# Altium PCB MDBU020.PcbDoc (part 1 of 2)
Units mil, origin at the board's own origin, x right, y up, seen from the top; angles counter-clockwise.
Board outline 2200 x 2400 mil, 4 copper layers (Top Layer, Signal Layer 1, Signal Layer 2, Bottom Layer), stack 62.8 mil thick; 105 components, 60 nets, 366 pads, 286 vias.
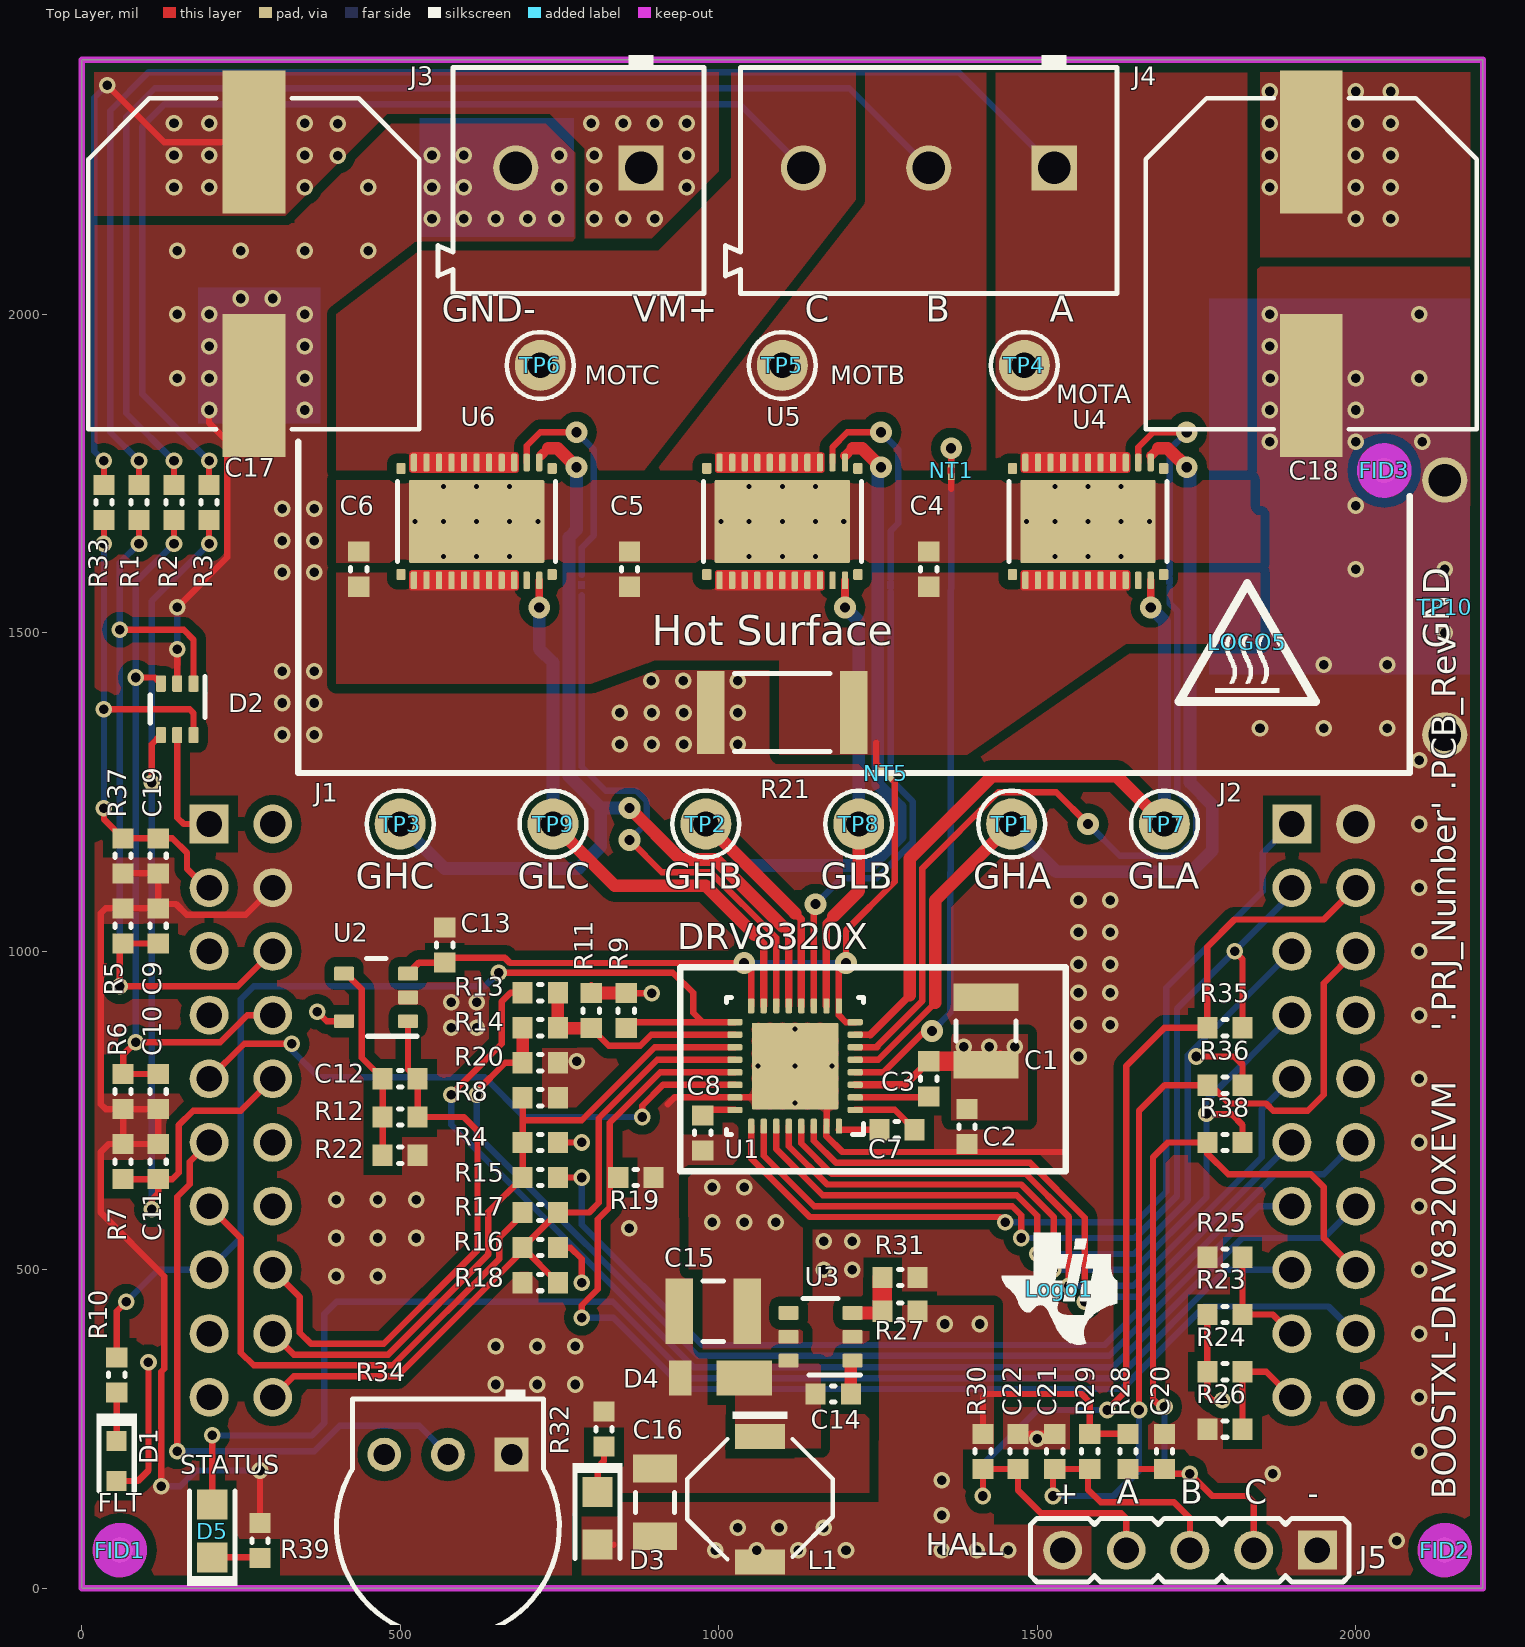
[diagram p0: Top Layer view]
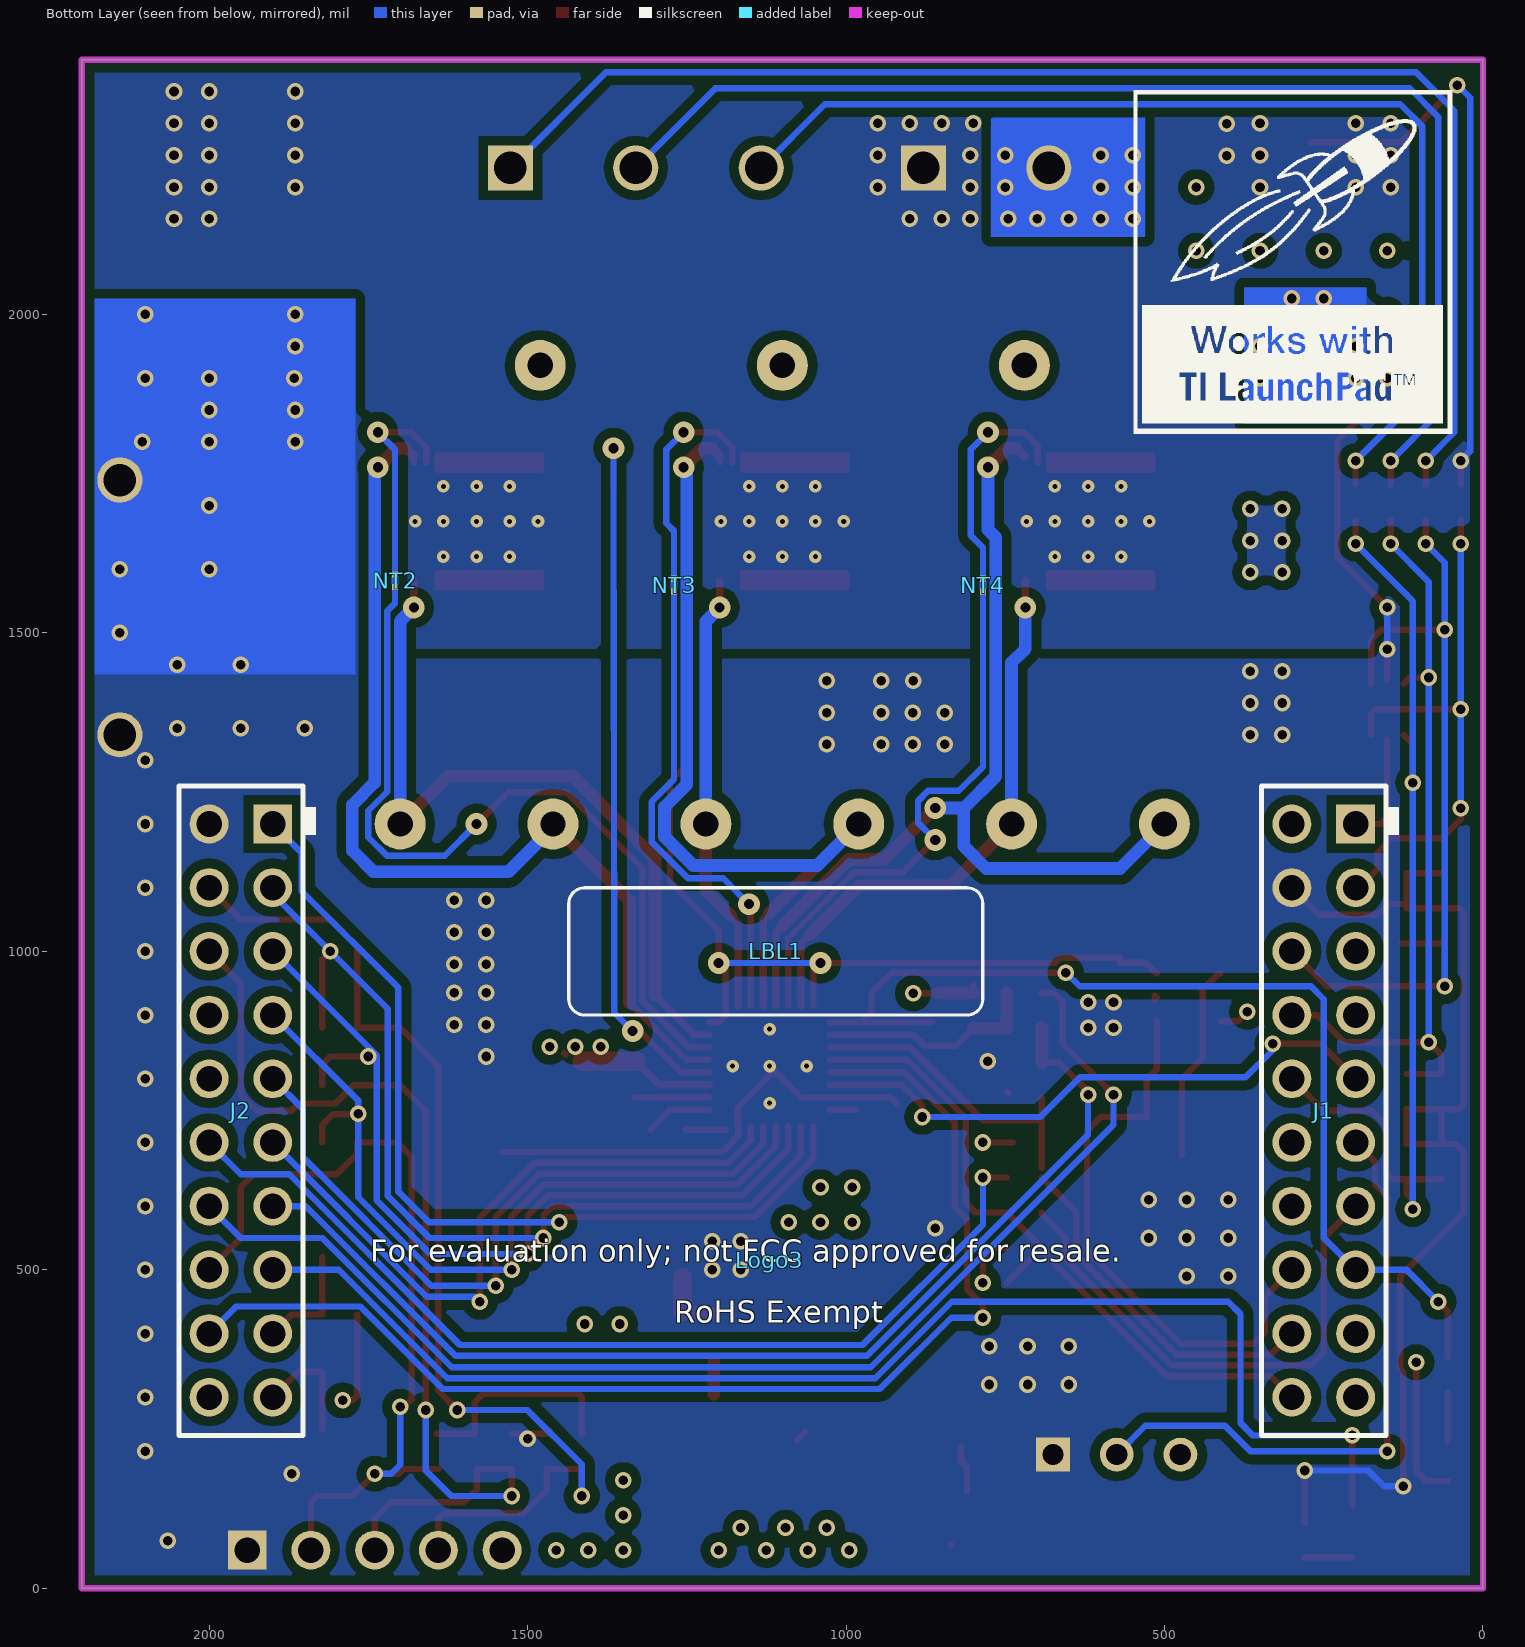
[diagram p1: Bottom Layer view, seen from below]
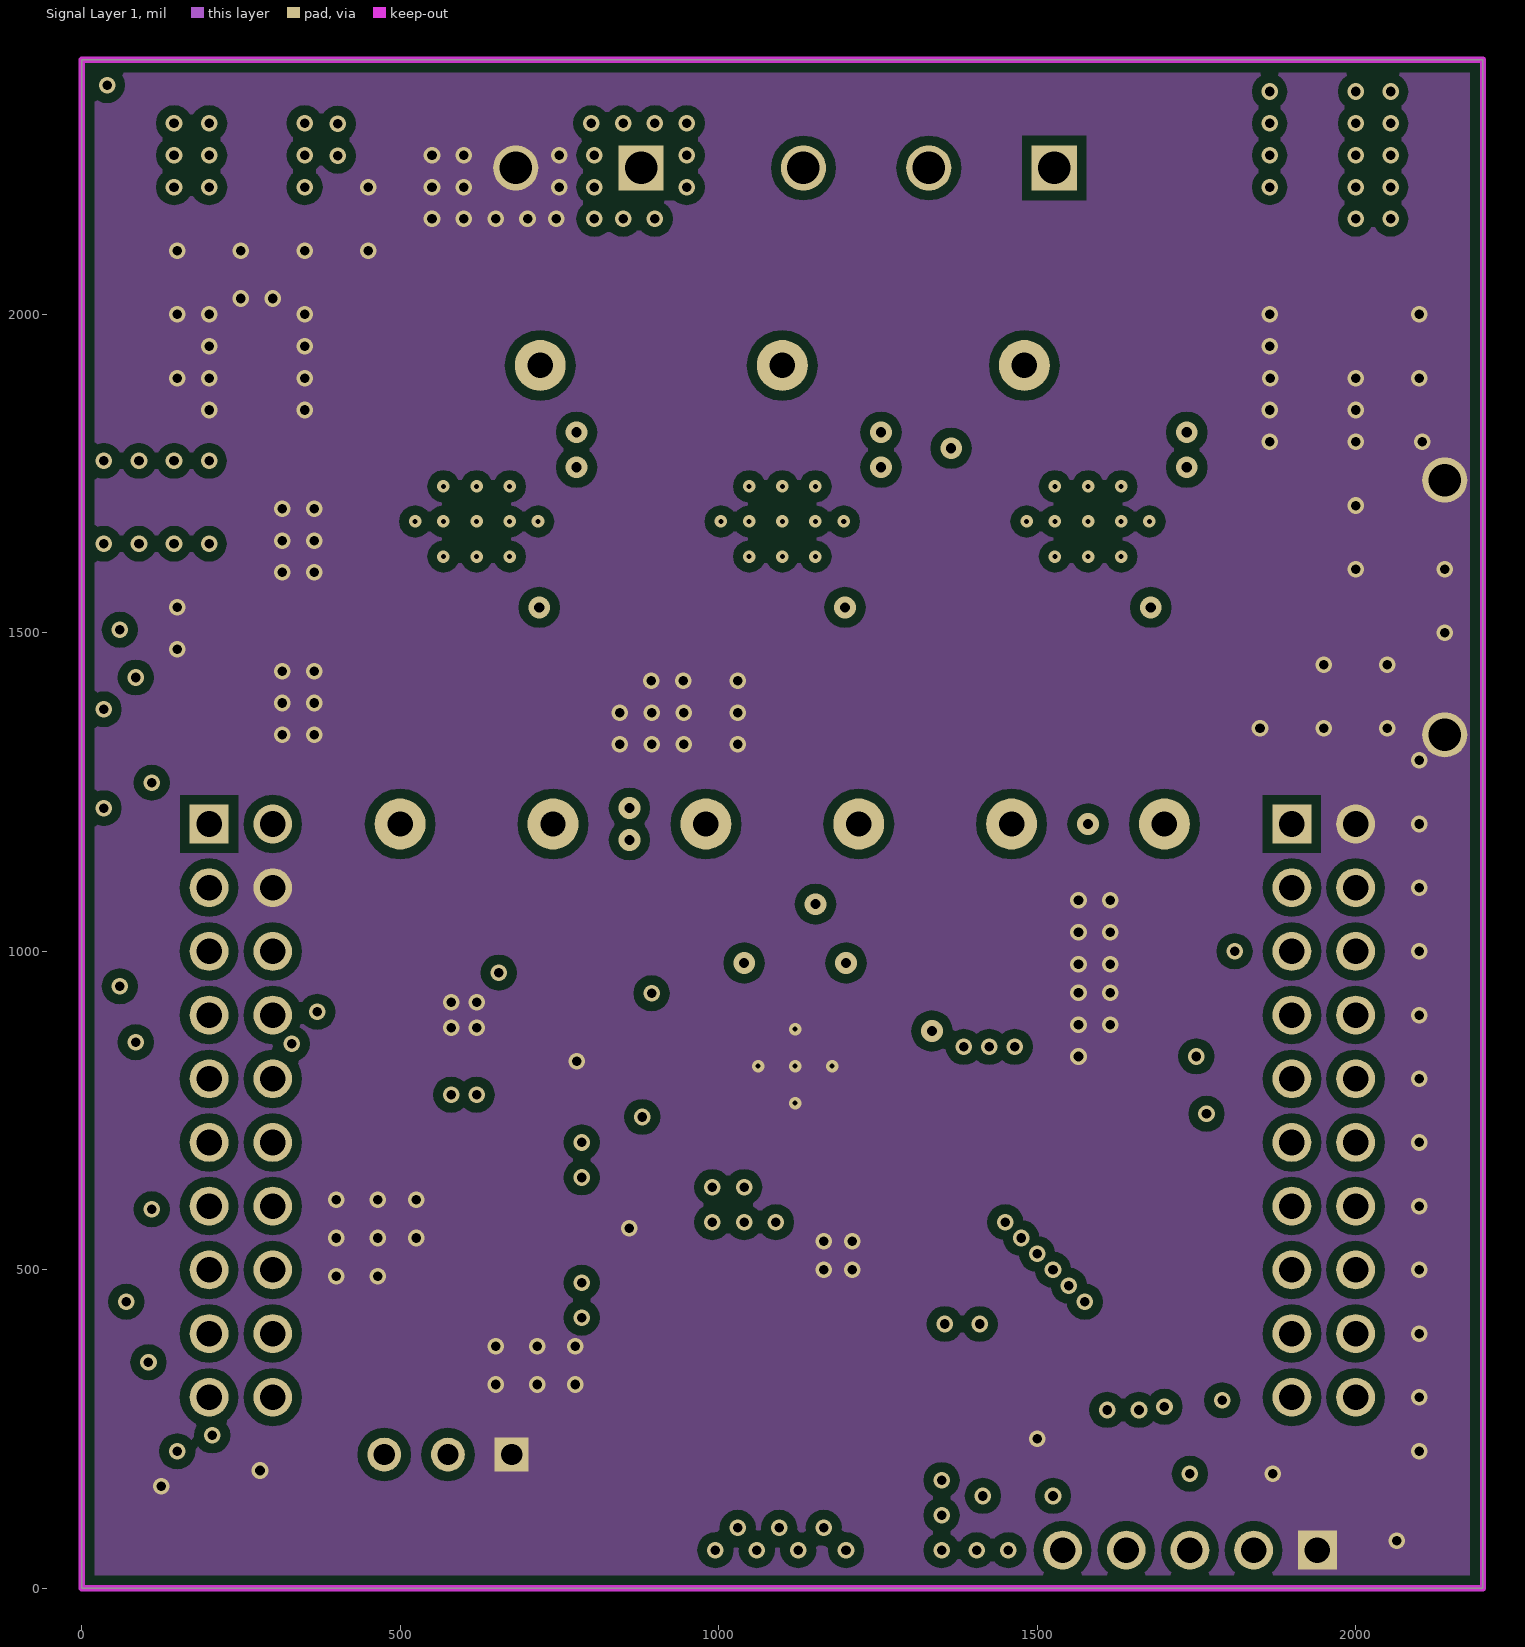
[diagram p2: Signal Layer 1]
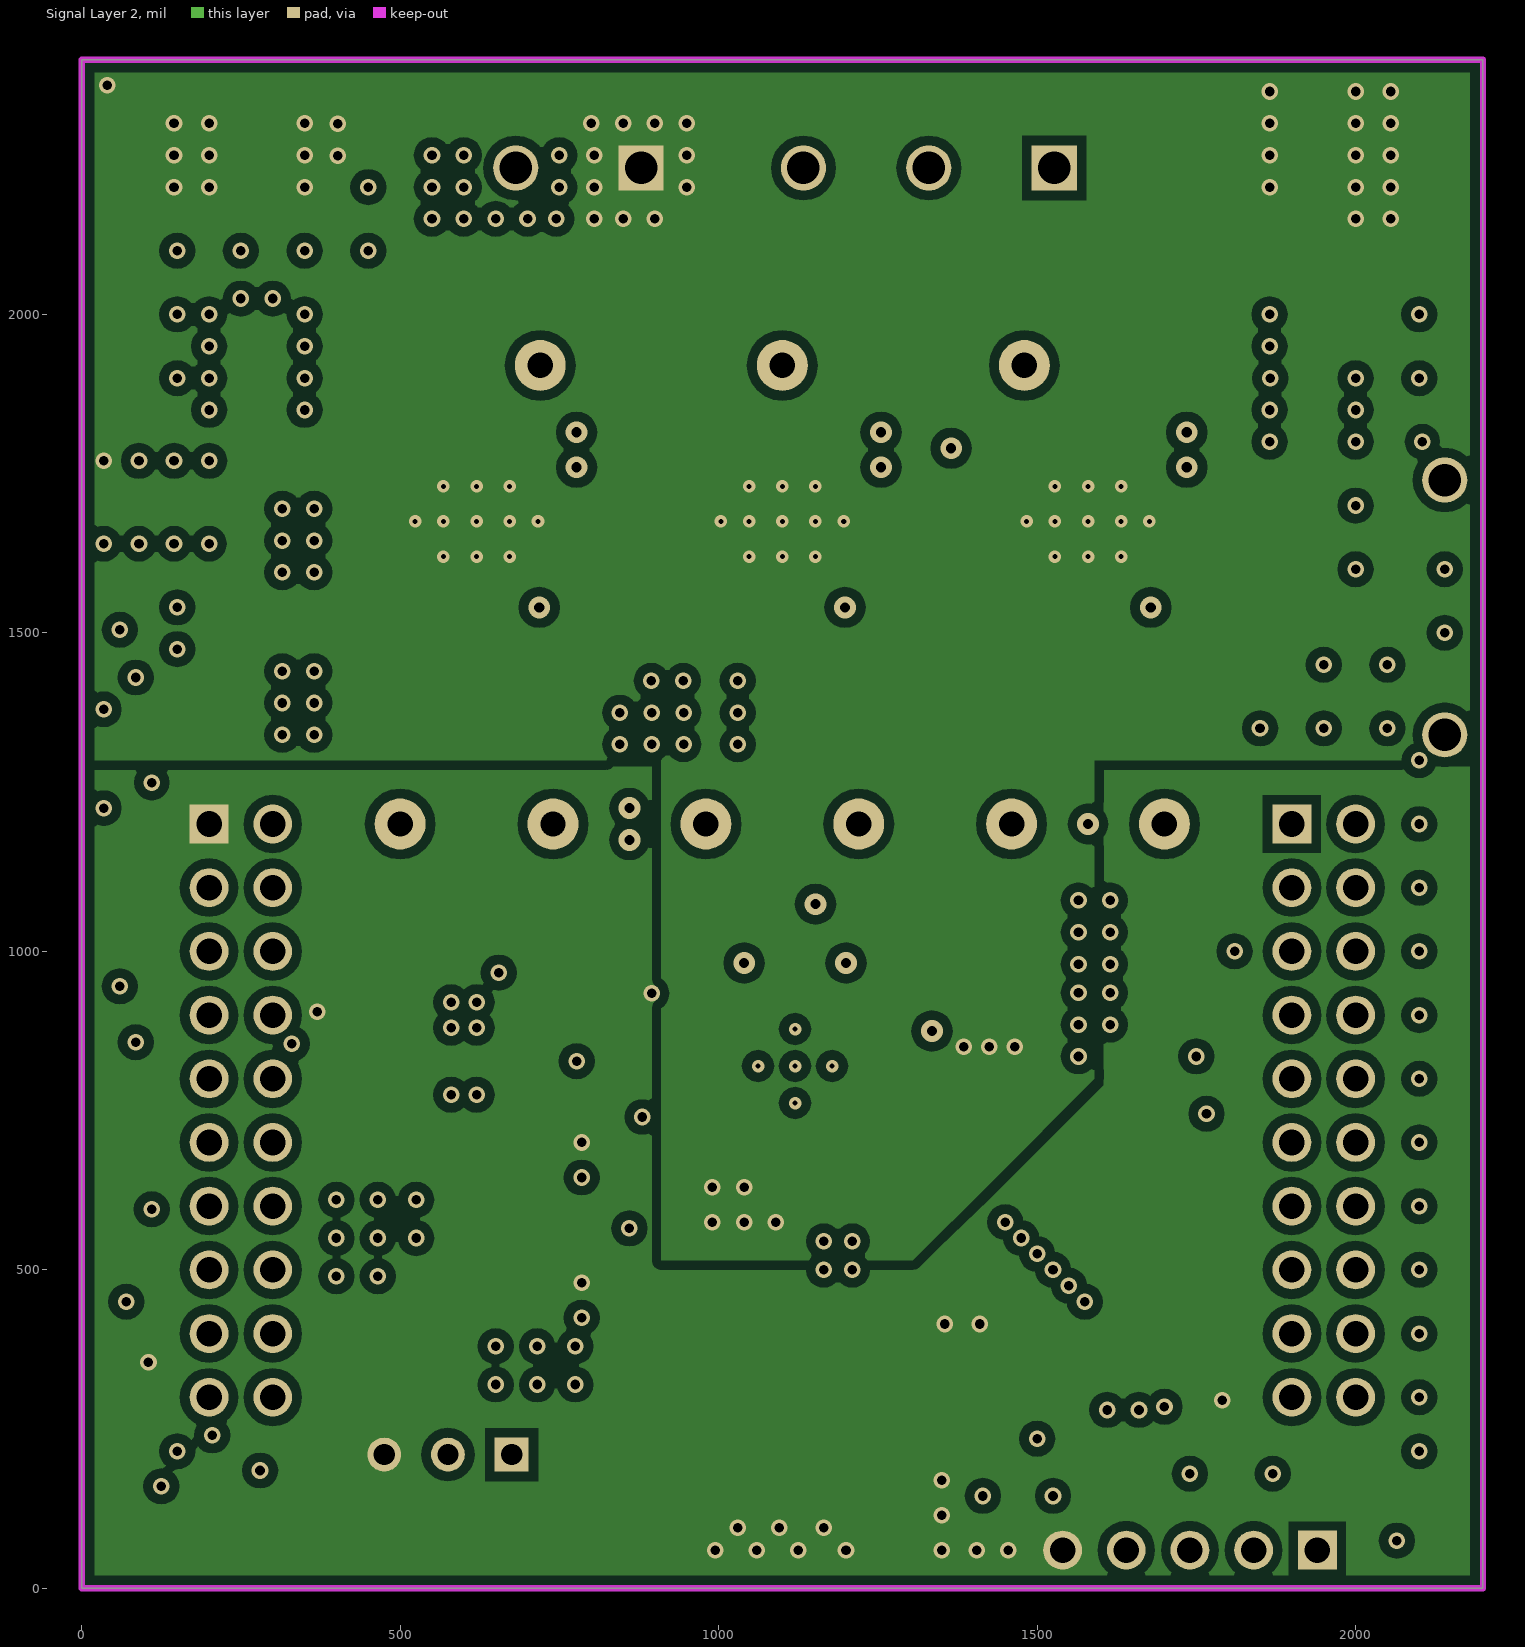
[diagram p3: Signal Layer 2]

## Layer stack, top to bottom
Top Solder: solder mask 0.4, Solder Resist, Dk 3.5
Top Layer: signal copper 2.8
Dielectric 1: prepreg 8, FR-4, Dk 4.2
Signal Layer 1: signal copper 1.4
Dielectric 2: core 38.4, FR-4, Dk 4.2
Signal Layer 2: signal copper 1.4
Dielectric 3: prepreg 8, FR-4, Dk 4.2
Bottom Layer: signal copper 2.8
Bottom Solder: solder mask 0.4, Solder Resist, Dk 3.5

## Board outline
0,0 2200,0 2200,2400 0,2400

## Design rules (kind name [scope] priority, off if disabled: settings)
AcuteAngle [All] p1: minimum=4.50000000000000E+0001 checktracksonly=FALSE
AssemblyTestPointUsage [All] p1: valid=2
Clearance Clearance_Keepouts [((IsTrack Or IsArc) And Not InPoly) And IsFree and IsKeepOut vs ((IsTrack Or IsArc) And Not InPoly) And IsFree and IsKeepOut] p1: gap=0 ignorepadtopadclearanceinfootprint=FALSE
Clearance Clearance_Poly [InPolygon] p2: gap=15 ignorepadtopadclearanceinfootprint=FALSE except(0: Arc-Hole Track-Hole SMDPad-Hole THPad-Hole Via-Hole Fill-Hole Poly-Hole Region-Hole Text-Hole)
Clearance [All] p3: gap=5 ignorepadtopadclearanceinfootprint=FALSE except(0: Arc-Hole Track-Hole SMDPad-Hole THPad-Hole Via-Hole Fill-Hole Poly-Hole Region-Hole Text-Hole)
ComponentClearance ComponentClearance_MountingHoles_FiducialMarks [InComponentClass('Mounting Holes') vs InComponentClass('FiducialMark')] p1: gap=50 collisioncheckmode=3 verticalgap=10 showdistances=FALSE
ComponentClearance ComponentClearance_Shunt [InComponentClass('Header') vs InComponentClass('Shunt')] p2: gap=0 collisioncheckmode=3 verticalgap=0 showdistances=FALSE
ComponentClearance ComponentClearance_Logo [InComponentClass('Logo')] p3: gap=20 collisioncheckmode=3 verticalgap=10 showdistances=FALSE
ComponentClearance ComponentClearance_ScrewToNut [(HasFootprint('NY PMS 440 0025 PH')) vs (HasFootprint('Keystone_1902C'))] p4: gap=5 collisioncheckmode=3 verticalgap=10 showdistances=FALSE
ComponentClearance ComponentClearance_MountingHoles [InComponentClass('Mounting Holes')] p5: gap=250 collisioncheckmode=3 verticalgap=100000 showdistances=FALSE
ComponentClearance ComponentClearance_SmallPassives [HasFootprint('0201*') or HasFootprint('0402*') or HasFootprint('0508') or HasFootprint('0603*') or HasFootprint('0612') or HasFootprint('0805*') or HasFootprint('0815*') or HasFootprint('0830*') or HasFootprint('1206*') or HasFootprint('1210*') or HasFootprint('1808*') or HasFootprint('1812*') or HasFootprint('1825*') or HasFootprint('2010*') or HasFootprint('2220*') or HasFootprint('2225*') or HasFootprint('2512*') or HasFootprint('2728*') or HasFootprint('3518*') vs HasFootprint('0201*') or HasFootprint('0402*') or HasFootprint('0508') or HasFootprint('0603*') or HasFootprint('0612') or HasFootprint('0805*') or HasFootprint('0815*') or HasFootprint('0830*') or HasFootprint('1206*') or HasFootprint('1210*') or HasFootprint('1808*') or HasFootprint('1812*') or HasFootprint('1825*') or HasFootprint('2010*') or HasFootprint('2220*') or HasFootprint('2225*') or HasFootprint('2512*') or HasFootprint('2728*') or HasFootprint('3518*')] p6: gap=14.96 collisioncheckmode=3 verticalgap=10 showdistances=FALSE
ComponentClearance ComponentClearance_THtoSMT [IsThruComponent vs IsSMTComponent] p7: gap=20 collisioncheckmode=3 verticalgap=20 showdistances=FALSE
ComponentClearance ComponentClearance_THtoTH [IsThruComponent vs IsThruComponent] p8: gap=20 collisioncheckmode=3 verticalgap=20 showdistances=FALSE
ComponentClearance [All] p9: gap=10 collisioncheckmode=3 verticalgap=10 showdistances=FALSE
DiffPairsRouting [All] p1: maxlimit=100 minlimit=10 mostfreqgap=10 toplayer_minwidth=15 toplayer_maxwidth=15 toplayer_prefwidth=15 midlayer1_minwidth=15 midlayer1_maxwidth=15 midlayer1_prefwidth=15 midlayer2_minwidth=15 midlayer2_maxwidth=15 midlayer2_prefwidth=15 bottomlayer_minwidth=15 bottomlayer_maxwidth=15 bottomlayer_prefwidth=15 maxuncoupledlength=1000
FabricationTestPointUsage TestPointUsage [All] p1: valid=2 allowmultiple=FALSE
FabricationTestpoint Testpoint [All] p1: side=3 testpointundercomponent=TRUE minsize=40 maxsize=100 preferedsize=60 minholesize=0 maxholesize=40 preferedholesize=32 testpointgrid=1 allowsidetop=TRUE allowsidebottom=TRUE usegrid=TRUE gridtolerance=0.01
FanoutControl Fanout_LCC [IsLCC] p1: bgadir=Out bgaviamode=Centered fanoutstyle=Auto fanoutdirection=Alternating viagrid=1 // Fanout_LCC (Default Rule)
FanoutControl Fanout_BGA [IsBGA] p2: bgadir=Out bgaviamode=Centered fanoutstyle=Auto fanoutdirection=Alternating viagrid=1 // Fanout_BGA (Default Rule)
FanoutControl Fanout_Default [All] p4: bgadir=Out bgaviamode=Centered fanoutstyle=Auto fanoutdirection=Alternating viagrid=1 // Fanout_Default (Default Rule)
FanoutControl Fanout_Small [(CompPinCount < 5)] p5: bgadir=Out bgaviamode=Centered fanoutstyle=Auto fanoutdirection=OutThenIn viagrid=1 // Fanout_Small (Default Rule)
HoleSize [All] p1: absolutevalues=TRUE maxlimit=251 minlimit=7.87 maxpercent=80.000 minpercent=20.000
MinimumAnnularRing MinimumAnnularRing_ThermalPadVias [IsVia and InAnyComponent] p1: minimumring=5.91
MinimumAnnularRing [All] p2: minimumring=5.5
MinimumSolderMaskSliver MinimumSolderMaskSliver_Logo [InComponentClass('Logo') vs InComponentClass('Logo')] p1: minsoldermaskwidth=0.7
MinimumSolderMaskSliver [All] p2: minsoldermaskwidth=3.94
PlaneClearance [All] p1: clearance=15
PlaneConnect [All] p1: planeconnectstyle=Relief reliefexpansion=10 reliefentries=4 reliefconductorwidth=10 reliefairgap=10
PolygonConnect [All] p1: connectstyle=Direct reliefconductorwidth=10 reliefentries=4 polygonreliefangle="90 Angle" airgapwidth=10
RoutingVias ThermalPadVias [IsVia and InAnyComponent] p1: holewidth=7.87 width=19.68 viastyle="Through Hole" minholewidth=7.87 minwidth=19.68 maxholewidth=12.99 maxwidth=23.62
RoutingVias [All] p2: holewidth=16 width=34 viastyle="Through Hole" minholewidth=7.87 minwidth=26 maxholewidth=40 maxwidth=65
SilkToBoardRegionClearance [Not ((IsComment or IsDesignator) And (Hide <> 'False')) and not InRegion(1000,500,4000,800)] p1:
SilkToSilkClearance SilkToSilkClearance_Pb-FreeLogo [(HasFootprint('Pb-Free_Overlay_Medium') OR HasFootprint('Pb-Free_Overlay_Small')) vs (HasFootprint('Pb-Free_Overlay_Medium') OR HasFootprint('Pb-Free_Overlay_Small'))] p1: silktosilkclearance=0
SilkToSilkClearance [All] p2: silktosilkclearance=4
SilkToSolderMaskClearance SilkToComponentPadClearance [IsPad and InAnycomponent] p1: minsilkscreentomaskgap=5 clearancetoexposedcopper=TRUE
SilkToSolderMaskClearance "Silk to Solder Mask Opening" [All] p2: minsilkscreentomaskgap=4 clearancetoexposedcopper=FALSE
SolderMaskExpansion [All] p1: expansion=1.97
Width [All] p1: maxlimit=100 minlimit=6 preferedwidth=10 checkconnectedcopper=TRUE
14 further rules are at their usual default settings.

## Classes and differential pairs
component class Logo: Logo1
component class Label: LBL1
component class Header: J5
component class FiducialMark: FID1 FID2 FID3
component class AssemblyNote: ZZ1 ZZ2 ZZ3 ZZ4
component class MDBU020: C1 C2 C3 C4 C5 C6 C7 C8 C9 C10 C11 C12 C13 C14 C15 C16 C17 C18 C19 C20 C21 C22 D1 D2 D3 D4 D5 J1 J2 J3 J4 J5 L1 NT1 NT2 NT3 NT4 NT5 R1 R2 R3 R4 R5 R6 R7 R8 R9 R10 R11 R12 R13 R14 R15 R16 R17 R18 R19 R20 R21 R22 R23 R24 R25 R26 R27 R28 R29 R30 R31 R32 R33 R34 R35 R36 R37 R38 R39 TP1 TP2 TP3 TP4 TP5 TP6 TP7 TP8 TP9 TP10 U1 U2 U3 U4 U5 U6
component class MDBU020_Hardware: FID1 FID2 FID3 LBL1 Logo1 Logo3 LOGO5 "Logo 6" ZZ1 ZZ2 ZZ3 ZZ4

## Components (designator, comment, footprint, x,y, rotation, side; value= is the part's Value field where it differs from the comment)
C1 "CGA6M3X7S2A475K200AB" 1210_220L 1420,875 r90 top
C2 "C1608X7S2A104K080AB" 0603L 1390,725 r270 top
C3 "GRM188R71C105KA12D" 0603L 1330,800 r270 top
C4 "GRM188R72A103KA01D" 0603L 1330,1600 r270 top
C5 "GRM188R72A103KA01D" 0603L 860,1600 r270 top
C6 "GRM188R72A103KA01D" 0603L 435,1600 r270 top
C7 "C1608X7R2A223K" 0603L 1280,720 r180 top
C8 "GRM188R70J105KA01D" 0603L 975,715 r270 top
C9 "GRM188R71C104KA01D" 0603L 120,1040 r90 top
C10 "GRM188R71C104KA01D" 0603L 120,780 r270 top
C11 "GRM188R71C104KA01D" 0603L 120,670 r90 top
C12 "06035A6R8CAT2A" 0603L 500,800 r180 top
C13 "885012206034" 0603L 570,1010 r90 top
C14 "0603YC104JAT2A" 0603L 1180,305 r180 top
C15 "GRM32ER72A225KA35L" 1210_220L 991.56,434.97 r180 top
C16 "GRM31CR61A226KE19L" 1206_180L 900,135 r90 top
C17 "EMVA630ADA331MKG5S" CAPSMT_62_KG5 270,2080 r270 top
C18 "EMVA630ADA331MKG5S" CAPSMT_62_KG5 1930,2080 r270 top
C19 "C0603C104K4RACTU" 0603L 120,1150 r270 top
C20 "885012206034" 0603L 1700,215 r90 top
C21 "885012206034" 0603L 1527.8,215 r90 top
C22 "885012206034" 0603L 1470,215 r90 top
D1 "150060RS75000" WL-SMCW_RED 55,200 r270 top
D2 "TPD4S009DCKRG4" DCK0006A_L 150,1380 r270 top
D3 "LTST-C171GKT" LED_LTST-C171 810,110 r90 top
D4 "DFLS1100-7" PowerDI123 990,330 r180 top
D5 "LTST-C171GKT" LED_LTST-C171 205,90 r270 top
FID1 "Fiducial" Fiducial10-20 60,60 r0 top
FID2 "Fiducial" Fiducial10-20 2140,60 r0 top
FID3 "Fiducial" Fiducial10-20 2045,1755 r0 top
J1 "SSQ-110-03-G-D" Samtec_SSQ-110-03-x-D 250,750 r270 bottom
J2 "SSQ-110-03-G-D" Samtec_SSQ-110-03-x-D 1950,750 r270 bottom
J3 "691 101 710 002" Wurth_691101710002 780,2230 r180 top
J4 "691 101 710 003" Wurth_691101710003 1330,2230 r180 top
J5 "PEC05SAAN" Sullins_PxC05SAAN 1740,60 r180 top
L1 "SD53-150-R" SD53 1065,140 r270 top
LBL1 "Size: 0.65\" x 0.20 \"" Label_650x200 1110.16,1000 r180 bottom
Logo1 "Texas Instruments" TI_Symbol_Overlay_Small 1535,470 r0 top
Logo3 "FCC disclaimer" FCC_disclaimer 1120,515 r180 bottom
LOGO5 "CAUTION HOT SURFACE" IEC_HotSurface_Small 1830,1485 r0 top
"Logo 6" "EU RoHS Exempt Logo" EURoHS_Exempt_60mil 2596.79,565 r180 bottom
NT1 "Net-Tie" Net-Tie_10mil 1365,1755 r270 top net-tie
NT2 "Net-Tie" Net-Tie_10mil 1708,1582.09 r270 bottom net-tie
NT3 "Net-Tie" Net-Tie_10mil 1270,1575 r270 bottom net-tie
NT4 "Net-Tie" Net-Tie_10mil 785,1575 r270 bottom net-tie
NT5 "Net-Tie" Net-Tie_10mil 1262.5,1280 r315 top net-tie
R1 "RC0603FR-0782KL" 0603L 90,1705 r90 top
R2 "RC0603FR-0782KL" 0603L 145,1705 r90 top
R3 "RC0603FR-0782KL" 0603L 200,1705 r90 top
R4 "CRCW060375K0JNEA" 0603L 720,700 r0 top
R5 "RC0603FR-074K99L" 0603L 65,1040 r270 top
R6 "RC0603FR-074K99L" 0603L 65,780 r90 top
R7 "RC0603FR-074K99L" 0603L 65,670 r270 top
R8 "CRCW060375K0JNEA" 0603L 720,770 r180 top
R9 "CRCW060310K0JNEA" 0603L 855,907 r90 top
R10 "CRCW0603330RJNEA" 0603L 55,335 r270 top
R11 "CRCW06031K50JNEA" 0603L 800,907 r90 top
R12 "CRCW060338K3FKEA" 0603L 500,740 r180 top
R13 "CRCW06030000Z0EA" 0603L 720,935 r180 top
R14 "CRCW06030000Z0EA" 0603L 720,880 r180 top
R15 "CRCW06030000Z0EA" 0603L 720,645 r0 top
R16 "CRCW060375K0JNEA" 0603L 720,535 r0 top
R17 "CRCW06030000Z0EA" 0603L 720,590 r180 top
R18 "CRCW060375K0JNEA" 0603L 720,480 r0 top
R19 "CRCW060347K0JNEA" 0603L 870,645 r180 top
R20 "CRCW060347K0JNEA" 0603L 720,825 r180 top
R21 "CRE2512-FZ-R007E-3" 2512L 1100,1375 r0 top
R22 "CRCW06032K00JNEA" 0603L 500,680 r180 top
R23 "RC0603FR-0735K7L" 0603L 1795,430 r180 top
R24 "RC0603FR-0735K7L" 0603L 1795,340 r180 top
R25 "RC0603FR-0735K7L" 0603L 1795,520 r0 top
R26 "RC0603FR-0735K7L" 0603L 1795,250 r0 top
R27 "CRCW060328K0FKEA" 0603L 1285,435 r0 top
R28 "CRCW06031K00JNEA" 0603L 1642.8,215 r90 top
R29 "CRCW06031K00JNEA" 0603L 1582.8,215 r90 top
R30 "CRCW06031K00JNEA" 0603L 1415,215 r90 top
R31 "CRCW06038K45FKEA" 0603L 1285,488 r180 top
R32 "RC0603JR-07330RL" 0603L 820,250 r270 top
R33 "RC0603FR-0782KL" 0603L 35,1705 r90 top
R34 "3352T-1-503LF" Bourns_3352T 575,210 r180 top
R35 "CRCW06030000Z0EA" 0603L 1795,880 r0 top
R36 "CRCW06030000Z0EA" 0603L 1795,790 r0 top
R37 "RC0603FR-074K99L" 0603L 65,1150 r90 top
R38 "CRCW06030000Z0EA" 0603L 1795,700 r0 top
R39 "CRCW0603330RJNEA" 0603L 280,75 r270 top
TP1 "5002" Keystone5002 1460,1200 r0 top
TP2 "5002" Keystone5002 980,1200 r0 top
TP3 "5002" Keystone5002 500,1200 r0 top
TP4 "5002" Keystone5002 1480,1920 r0 top
TP5 "5002" Keystone5002 1100,1920 r0 top
TP6 "5002" Keystone5002 720,1920 r0 top
TP7 "5002" Keystone5002 1700,1200 r0 top
TP8 "5002" Keystone5002 1220,1200 r0 top
TP9 "5002" Keystone5002 740,1200 r0 top
TP10 "D3082-05" Harwin_D3082-05 2140,1540 r90 top
U1 "DRV8320SRHBR" RHB0032E 1120,820 r180 top
U2 "OPA374AIDBVTG4" DBV0005A_L 462.2,927.8 r180 top
U3 "LMR16006XDDCR" DDC0006A_L 1160,395 r180 top
U4 "CSD88599Q5DC" DMM0022A 1580,1675 r270 top
U5 "CSD88599Q5DC" DMM0022A 1100,1675 r270 top
U6 "CSD88599Q5DC" DMM0022A 620,1675 r270 top
ZZ1 "This Assembly Note is for PCB labels only" AssemblyNoteLabel 50,2745 r0 top
ZZ2 "These assemblies are ESD sensitive, ESD precautions shall be observed." AssemblyNote 50,2659.11 r0 top
ZZ3 "These assemblies must be clean and free from flux and all contaminants. Use of no clean flux is not acceptable." AssemblyNote 50,2570.56 r0 top
ZZ4 "These assemblies must comply with workmanship standards IPC-A-610 Class 2, unless otherwise specified." AssemblyNote 50,2482 r0 top

## Footprints (in the part's own frame and the unit in brackets; to place one, negate y for a bottom-side part, rotate by r counter-clockwise, add the part's x,y. Pads: shape width x height; smd on the part's side, far side on the other; paste and mask are expansions set on the pad)
0603L [mm] "0603 from SM-752 data"
  rect 0.8x0.85 smd: 1(-0.7,0) 2(0.7,0)
  silkscreen extent -0.07,-0.33 0.07,0.33, body extent -0.87,-0.47 0.87,0.47, height 1
1206_180L [mm] "1206_180"
  rect 1.1x1.75 smd: 1(-1.35,0) 2(1.35,0)
  silkscreen extent -0.4,-0.77 0.4,0.77, body extent -1.75,-0.95 1.75,0.95, height 1.8
1210_220L [mm] "1210"
  rect 1.1x2.6 smd: 1(-1.35,0) 2(1.35,0)
  silkscreen extent -0.4,-1.2 0.4,1.2, body extent -1.7,-1.35 1.7,1.35, height 2.2
2512L [mm] "Chip Resistor, Body 6.3x3.2mm, IPC High Density"
  rect 1.1x3.3 smd: 1(-2.85,0) 2(2.85,0)
  silkscreen extent -1.9,-1.55 1.9,1.55, body extent -3.22,-1.67 3.22,1.67, height 0.71
AssemblyNote [mil] "Assembly Note"
AssemblyNoteLabel [mil] "Assembly Note for PCB Labels"
Bourns_3352T [mm] "TH, 3-Leads, Body 9.53x8.89mm, Pitch 2.54mm"
  rect 1.35x1.35 hole 0.85: 1(-2.54,0)
  round 1.35 hole 0.85: 2(0,0) 3(2.54,0)
  silkscreen extent -4.44,-2.6 4.44,7.31, body extent -4.44,-2.21 4.45,7.32, height 3.81
CAPSMT_62_KG5 [mm] "12.5 x 16mm:  Chemi-Con KG5"
  rect 5.7x2.5 smd: 1(-4.838,0.012) 2(4.862,0.012)
  silkscreen extent -6.59,-6.59 6.61,6.61, body extent -6.59,-6.59 6.61,6.61, height 16.5
DBV0005A_L [mm] "SOT23, 5-Leads, Body 2.9x1.6mm, Pitch 0.95mm, Lead Span 2.8mm, IPC High Density"
  rrect18% 0.8x0.55 smd: 1(-1.275,0.95) 2(-1.275,0) 3(-1.275,-0.95) 4(1.275,-0.95) 5(1.275,0.95)
  silkscreen extent -1.62,-1.55 0.38,1.55, body extent -1.42,-1.46 1.42,1.46, height 1.09
DCK0006A_L [mm] "SOT23, 6-Leads, Body 2x1.3mm, Pitch 0.65mm, Lead Span 2.1mm, IPC High Density"
  rrect25% 0.65x0.4 smd: 1(-1.025,0.65) 2(-1.025,0) 3(-1.025,-0.65) 4(1.025,-0.65) 5(1.025,0) 6(1.025,0.65)
  silkscreen extent -1.3,-1.07 0.55,1.1, body extent -1.14,-1 1.14,1, height 0.95
DDC0006A_L [mm]
  rrect18% 0.8x0.55 smd: 1(-1.275,0.95) 2(-1.275,0) 3(-1.275,-0.95) 4(1.275,-0.95) 5(1.275,0) 6(1.275,0.95)
  silkscreen extent -1.6,-1.52 0.7,1.53, body extent -1.43,-1.48 1.43,1.49, height 0.92
DMM0022A [mm] "SON, 27-Leads, Body 5x6mm, Pitch 0.5mm"
  rrect40% 0.7x0.25 smd: 1(-2.35,2.5) 2(-2.35,2) 21(2.35,2) 22(2.35,2.5)
  rrect40% 0.7x0.25 smd mask+0: 3(-2.35,1.5) 4(-2.35,1) 5(-2.35,0.5) 6(-2.35,0) 7(-2.35,-0.5) 8(-2.35,-1) 9(-2.35,-1.5) 10(-2.35,-2) 11(-2.35,-2.5) 12(2.35,-2.5) 13(2.35,-2) 14(2.35,-1.5) 15(2.35,-1) 16(2.35,-0.5) 17(2.35,0) 18(2.35,0.5) 19(2.35,1) 20(2.35,1.5)
  rrect27% 0.43x0.375 smd: 23(-2.115,3.013) 24(-2.115,-3.013) 25(2.115,-3.013) 26(2.115,3.013)
  rrect3% 3.3x5.4 smd paste-1.65: 27(0,0)
  rrect9% 1.41x1.12 on Top Paste: ""(-0.805,1.98) ""(-0.805,-0.66) ""(-0.805,0.66) ""(-0.805,-1.98) ""(0.805,1.98) ""(0.805,-0.66) ""(0.805,0.66) ""(0.805,-1.98)
  Top Layer region: 2.3,1.5 2,1.5 2,-2.5 2.3,-2.5
  Top Layer region: -2.3,-2.5 -2,-2.5 -2,1.5 -2.3,1.5
  Top Layer region: 2.75,-2.575 2.75,1.575 2.742,1.613 2.721,1.646 2.688,1.667 2.65,1.675 2.65,1.675 2.05,1.675 2.012,1.667 1.979,1.646 1.958,1.613 1.95,1.575 1.95,1.575 1.95,-2.575 1.958,-2.613 1.979,-2.646 2.012,-2.667 2.05,-2.675 2.05,-2.675 2.65,-2.675 2.688,-2.667 2.721,-2.646 2.742,-2.613 2.75,-2.575
  Top Layer region: -2.75,-2.575 -2.75,1.575 -2.742,1.613 -2.721,1.646 -2.688,1.667 -2.65,1.675 -2.65,1.675 -2.05,1.675 -2.012,1.667 -1.979,1.646 -1.958,1.613 -1.95,1.575 -1.95,1.575 -1.95,-2.575 -1.958,-2.613 -1.979,-2.646 -2.012,-2.667 -2.05,-2.675 -2.05,-2.675 -2.65,-2.675 -2.688,-2.667 -2.721,-2.646 -2.742,-2.613 -2.75,-2.575
  silkscreen extent -1.6,-3.15 1.6,3.15, body extent -2.5,-3 2.5,3, height 1.05
EURoHS_Exempt_60mil [mil] "EU RoHS Exempt symbol"
FCC_disclaimer [mil]
Fiducial10-20 [mm]
  round 1 smd mask+0.5: 1(0,0)
  Top Layer keep-out circle w1.178: c0,0 r0.5
Harwin_D3082-05 [mm] "Shorting Plug, 10.16mm spacing, TH"
  round 1.8 hole 1.3: 1(-5.08,0) 2(5.08,0)
  body extent -5.6,-0.52 5.61,0.52, height 6.63
IEC_HotSurface_Small [mil]
  silkscreen extent -107,-93 107,92
Keystone5002 [mil] "For Keystone 500x miniature loop terminals"
  round 80 hole 40: 1(0,0)
  silkscreen extent -52,-52 52,52, body extent -49,-49 49,49, height 182
Label_650x200 [mil] "Thermal Transfer Label"
  silkscreen extent -325,-100 325,100, body extent -325,-100 325,100, height 1
LED_LTST-C171 [mm] "LITE-ON"
  rect 1.2x1.2 smd: 1(-1.05,0) 2(1.05,0)
  silkscreen extent -1.6,-1 2.2,1, body extent -1.05,-0.67 1.05,0.67, height 0.8
Net-Tie_10mil [mil] "10mil net tie, no solder mask opening, no solder paste"
  rect 10x10 smd paste-5 mask-5: 1(-10,0) 2(10,0)
  Top Layer region: -6,5 6,5 6,-5 -6,-5
PowerDI123 [mm] "Diodes Inc recommended land pattern, document number DS30628 Rev. 6-2"
  rect 2.2x1.4 smd: 1(-1.275,0)
  rect 0.9x1.4 smd: 2(1.275,0)
  body extent -2.38,-0.97 1.52,0.96, height 1
RHB0032E [mm] "QFN, 32-Leads, Body 5x5mm, Pitch 0.5mm, Thermal Pad 3.45x3.45mm, TI Recommended"
  rrect40% 0.6x0.25 smd: 1(-2.4,1.75) 2(-2.4,1.25) 3(-2.4,0.75) 4(-2.4,0.25) 5(-2.4,-0.25) 6(-2.4,-0.75) 7(-2.4,-1.25) 8(-2.4,-1.75) 17(2.4,-1.75) 18(2.4,-1.25) 19(2.4,-0.75) 20(2.4,-0.25) 21(2.4,0.25) 22(2.4,0.75) 23(2.4,1.25) 24(2.4,1.75)
  rrect40% 0.25x0.6 smd: 9(-1.75,-2.4) 10(-1.25,-2.4) 11(-0.75,-2.4) 12(-0.25,-2.4) 13(0.25,-2.4) 14(0.75,-2.4) 15(1.25,-2.4) 16(1.75,-2.4) 25(1.75,2.4) 26(1.25,2.4) 27(0.75,2.4) 28(0.25,2.4) 29(-0.25,2.4) 30(-0.75,2.4) 31(-1.25,2.4) 32(-1.75,2.4)
  rrect3% 3.45x3.45 smd paste-1.725: 33(0,0)
  rrect7% 1.49x1.49 on Top Paste: ""(-0.845,0.845) ""(-0.845,-0.845) ""(0.845,0.845) ""(0.845,-0.845)
  silkscreen extent -2.73,-2.73 2.73,2.73, body extent -2.57,-2.57 2.58,2.58, height 1.01
Samtec_SSQ-110-03-x-D [mm] "Receptacle, 2.54mm, 10x2, TH"
  rect 1.55x1.55 hole 1.02: 1(-11.43,1.27)
  round 1.55 hole 1.02: 2(-11.43,-1.27) 3(-8.89,1.27) 4(-8.89,-1.27) 5(-6.35,1.27) 6(-6.35,-1.27) 7(-3.81,1.27) 8(-3.81,-1.27) 9(-1.27,1.27) 10(-1.27,-1.27) 11(1.27,1.27) 12(1.27,-1.27) 13(3.81,1.27) 14(3.81,-1.27) 15(6.35,1.27) 16(6.35,-1.27) 17(8.89,1.27) 18(8.89,-1.27) 19(11.43,1.27) 20(11.43,-1.27)
  silkscreen extent -12.95,-2.48 12.95,3, body extent -12.95,-2.48 12.95,2.48, height 8.51
SD53 [mm] "COOPER BUSSMAN"
  rect 1x2 smd: 1(-2.5,0) 2(2.5,0)
  silkscreen extent -3.5,-2.9 2.4,2.9, body extent -2.86,-2.86 2.86,2.86, height 3.01
Sullins_PxC05SAAN [mm] "Header, 2.54mm, 5x1, TH"
  rect 1.55x1.55 hole 1.016: 1(-5.08,0)
  round 1.55 hole 1.016: 2(-2.54,0) 3(0,0) 4(2.54,0) 5(5.08,0)
  silkscreen extent -6.35,-1.27 6.35,1.27, body extent -6.35,-1.27 6.35,1.27, height 5.84
TI_Symbol_Overlay_Small [mil]
  silkscreen extent -90,-88 91,88
WL-SMCW_RED [mm] "WURTH"
  rect 0.8x0.8 smd: 1(-0.8,0) 2(0.8,0)
  silkscreen extent -1.9,-0.8 1.2,0.8, body extent -0.85,-0.45 0.85,0.45, height 0.8
Wurth_691101710002 [mm] "Terminal Block, 5 mm, 2x1, TH"
  rect 1.8x1.8 hole 1.3: 1(-2.5,0)
  round 1.8 hole 1.3: 2(2.5,0)
  silkscreen extent -5,-4.5 5.6,5, body extent -5.6,-4 5.6,5, height 12.5
Wurth_691101710003 [mm] "Terminal Block, 5 mm, 3x1, TH"
  rect 1.8x1.8 hole 1.3: 1(-5,0)
  round 1.8 hole 1.3: 2(0,0) 3(5,0)
  silkscreen extent -7.5,-4.5 8.1,5, body extent -8.1,-4 8.1,5, height 12.5

## Part data
C1: "CAP, CERM, 4.7 µF, 100 V, +/- 10%, X7S, AEC-Q200 Grade 1, 1210"
C2: "CAP, CERM, 0.1 µF, 100 V, +/- 10%, X7S, 0603"
C3: "CAP, CERM, 1 µF, 16 V, +/- 10%, X7R, 0603"
C4 C5 C6: "CAP, CERM, 0.01 µF, 100 V, +/- 10%, X7R, 0603"
C7: "CAP, CERM, 0.022 µF, 100 V, +/- 10%, X7R, 0603"
C8: "CAP, CERM, 1 µF, 6.3 V, +/- 10%, X7R, 0603"
C9 C10 C11 C19: "CAP, CERM, 0.1 µF, 16 V, +/- 10%, X7R, 0603"
C12: "CAP, CERM, 6.8 pF, 50 V, +/- 4%, C0G/NP0, 0603"
C13 C20 C21 C22: "CAP, CERM, 1000 pF, 16 V, +/- 10%, X7R, 0603"
C14: "CAP, CERM, 0.1 µF, 16 V, +/- 5%, X7R, 0603"
C15: "CAP, CERM, 2.2 µF, 100 V, +/- 10%, X7R, 1210"
C16: "CAP, CERM, 22 µF, 10 V, +/- 10%, X5R, 1206"
C17 C18: "CAP, AL, 330 µF, 63 V, +/- 20%, SMD"
D1: "LED, Red, SMD"
D2: "ESD Solution for High-Speed Differential Interface, 4 Channels, -40 to +85 degC, 6-pin SC70 (DCK), Green (RoHS & no Sb/Br)"
D3 D5: "LED, Green, SMD"
D4: "Diode, Schottky, 100 V, 1 A, PowerDI123"
FID1 FID2 FID3: "Fiducial mark.  There is nothing to buy or mount."
J1 J2: "Receptacle, 2.54mm, 10x2, Gold, TH"
J3: "Terminal Block, 5 mm, 2x1, Tin, TH"
J4: "Terminal Block, 5 mm, 3x1, Tin, TH"
J5: "Header, 2.54mm, 5x1, Tin, TH"
L1: "Inductor, Shielded Drum Core, Ferrite, 15 µH, 1.1 A, 0.122 ohm, SMD"
LBL1: library part THT-14-423-10, "Thermal Transfer Printable Labels, 0.650\" W x 0.200\" H - 10,000 per roll"
Logo1: library part TI_Logo, "Texas Instrument Corporate Signature"
Logo3: library part FCC_disclaimer, "FCC_disclaimer"
LOGO5: library part IEC_HotSurface, "IEC 61010-1 Hot Surface Warning"
"Logo 6": library part EURoHS_Exempt
NT1 NT2 NT3 NT4 NT5: "Single point connection between nets."
R1 R2 R3 R33: "RES, 82.0 k, 1%, 0.1 W, 0603"
R4 R8 R16 R18: "RES, 75 k, 5%, 0.1 W, 0603"
R5 R6 R7 R37: "RES, 4.99 k, 1%, 0.1 W, 0603"
R9: "RES, 10 k, 5%, 0.1 W, 0603"
R10: "RES, 330 ohm, 5%, 0.1W, 0603"
R11: "RES, 1.5 k, 5%, 0.1 W, 0603"
R12: "RES, 38.3 k, 1%, 0.1 W, 0603"
R13 R14 R15 R17 R35 R36 R38: "RES, 0, 5%, 0.1 W, 0603"
R19 R20: "RES, 47 k, 5%, 0.1 W, 0603"
R21: library part PMR100HZPFU7L00, "RES SMD 0.007 OHM 1% 3W 2512"
R22: "RES, 2.0 k, 5%, 0.1 W, 0603"
R23 R24 R25 R26: "RES, 35.7 k, 1%, 0.1 W, 0603"
R27: "RES, 28.0 k, 1%, 0.1 W, 0603"
R28 R29 R30: "RES, 1.0 k, 5%, 0.1 W, 0603"
R31: "RES, 8.45 k, 1%, 0.1 W, 0603"
R32 R39: "RES, 330, 5%, 0.1 W, 0603"
R34: "Trimming Potentiometer, 50K, 0.5W, TH"
TP1 TP2 TP3 TP4 TP5 TP6 TP7 TP8 TP9: "Test Point, Miniature, White, TH"
TP10: "1mm Uninsulated Shorting Plug, 10.16mm spacing, TH"
U1: "60-V Three-Phase Smart Gate Driver, RHB0032E"
U2: "6.5 MHz, 585 uA, Rail-to-Rail I/O CMOS Operational Amplifier, 2.3 to 5.5 V, -40 to 125 degC, 5-pin SOT23 (DBV0005A), Green (RoHS & no Sb/Br)"
U3: "Wide Input Voltage Range Buck Regulator with High Efficiency Sleep Mode, DDC0006A"
U4 U5 U6: "60 V Half-Bridge NexFE Power Block, DMM0022A (LSON-CLIP-27)"
ZZ1: library part AssemblyNoteLabel
ZZ2 ZZ3 ZZ4: library part AssemblyNote

## Via types
v1: diameter 26, hole 15, Top Layer to Bottom Layer, tented both sides, 231 vias
v2: diameter 19.68, hole 7.87, Top Layer to Bottom Layer, 38 vias
v3: diameter 34, hole 16, Top Layer to Bottom Layer, tented both sides, 17 vias

## Nets (pads, with @x,y where several pads share a name; then routed paths per layer and width w, separated by ;. In a path a pad name is that pad's centre, name@x,y a point inside that pad or via, vN(x,y) a via of type N, cw(c..) or ccw(c..) an arc to the next point about the centre after c; other vN are vias at no path point)
3.3V: C16.1 D1.2 D2.5 D3.1 J1.1 J5.5 L1.2 R4.2 R9.2 R11.2 R16.2 R23.2 R24.2 R27.2 R28.2 R29.2 R30.2 R34.3 U2.5 | length 1172.6
  Top Layer w10: D1.2@55,168.5 88.5,168.5 105,185 104.88,185.12 v1(104.88,355) ; D2.5@150,1332.76 150,1210 160,1200 J1.1@200,1200 ; v1(370,905) 384.61,890.39 U2.5@412,890.39 ; R4.2@738.11,700 v1(785,700) ; R16.2@747.56,535 767.24,535 785,517.24 v1(785,480) ; R11.2@800,946.89 R11.2@802.13,944.76 ; 835,68.16 835,68.66 ; R9.2@855.44,934.12 v1(894.71,934.12) ; R30.2@1412.87,244.69 R30.2@1415,242.56 1415,301.17 ; 1418.83,305 1570,305 1582.8,292.2 R29.2@1582.8,242.56 R28.2@1642.8,242.56 ; R23.2@1767.44,430 R24.2@1767.44,340 1767.44,302.56 1775,295 v1(1790.39,295)
  Top Layer w20: R11.2@800,934.56 R9.2@855,934.56
  other v1: 995,60 1060,60 1125,60 1200,60 1350,60 1405,60 1455,60 1030,95 1095,95 1165,95 1350,115 1350,170 1355,415 1410,415
ENABLE: J1.9 U1.22 | length 933.2
  Top Layer w10: J1.9@200,800 255,855 v1(330,855) ; v1(880,740) 880,757.88 912.6,790.47 U1.22@1025.51,790.47
  Bottom Layer w10: v1(330,855) 330,845 372.72,802.28 632.72,802.28 695,740 v1(880,740)
GHA: TP1.1 U1.5 U4.1 | length 1551.4
  Top Layer w10: U1.5@1214.49,829.84 1250.38,829.84 1340,919.47 ; U4.1@1678.43,1767.52 U4.1@1678.43,1777.91
  Top Layer w15: U4.1@1678.43,1777.91 1690.52,1790
  Top Layer w20: 1340,919.47 1340,1080 TP1.1@1460,1200 ; 1690.52,1790 1705,1790 v3(1735,1760)
  Bottom Layer w10: TP1.1@1460,1195 TP1.1@1460,1200
  Bottom Layer w20: TP1.1@1460,1195 1530,1125 1741.87,1125 1775,1158.13 1775,1230 1740,1265 v3@1740,1755
GHB: TP2.1 U1.12 U5.1 | length 1372.2
  Top Layer w10: U5.1@1198.42,1767.52 U5.1@1198.42,1777.91
  Top Layer w12: 1120,1060 1129.84,1050.16 U1.12@1129.84,914.49
  Top Layer w15: U5.1@1198.42,1777.91 1210.52,1790
  Top Layer w20: TP2.1@980,1200 1120,1060 ; 1210.52,1790 1225,1790 v3(1255,1760)
  Bottom Layer w20: TP2.1@980,1200 1045.18,1134.82 1239.82,1134.82 1285,1180 1285,1226.92 1250,1261.92 1250,1680 v3@1250,1755
GHC: TP3.1 U1.13 U6.1 | length 1538.4
  Top Layer w10: v3@776.09,1760 v3(777,1760)
  Top Layer w12: 1105,1035 1110.16,1029.84 U1.13@1110.16,914.49
  Top Layer w15: U6.1@720.42,1777.91 732.52,1790
  Top Layer w20: 732.52,1790 747,1790 v3(777,1760) ; v3(860,1225) 940.61,1144.39 995.61,1144.39 1100,1040
  Bottom Layer w20: TP3.1@500,1200 570,1130 780,1130 815,1165 815,1225 ; v3(777,1760) 777,1662 765,1650 765,1275 815,1225 ; v3(860,1225) 815,1225
GLA: TP7.1 U1.7 U4.22 | length 1202
  Top Layer w10: U1.7@1214.49,869.21 1238.25,869.21
  Top Layer w12: 1238.25,869.21 1300,930.96 ; v3(1678.43,1540) U4.22@1678.43,1582.48
  Top Layer w20: 1300,930.96 1300,1145.97 1429.03,1275 1625,1275 TP7.1@1700,1200
  Bottom Layer w20: v3(1678.43,1540) 1700,1518.43 TP7.1@1700,1200
GLB: TP8.1 U1.10 U5.22 | length 698
  Top Layer w12: U1.10@1169.21,914.49 1169.21,1044.21 1180,1055 ; v3(1198.42,1540) U5.22@1198.43,1582.48
  Top Layer w20: 1180,1055 1220,1095 TP8.1@1220,1200
  Bottom Layer w20: v3(1198.42,1540) 1220,1518.43 1220,1453.43 TP8.1@1220,1200
GLC: TP9.1 U1.15 U6.22 | length 897.6
  Top Layer w12: v3(718.42,1540) U6.22@718.43,1582.48 ; 1056.37,1026.51 1070.79,1012.09 U1.15@1070.79,914.49
  Top Layer w20: TP9.1@740,1200 837.12,1102.88 980,1102.88 1056.37,1026.51
  Bottom Layer w20: v3(718.42,1540) 718.42,1475 720,1473.43 740,1453.43 TP9.1@740,1200
GND: C1.2 C2.2 C8.2 C9.2 C10.2 C11.2 C13.2 C15.2 C16.2 C17.2 C18.2 C19.2 C20.2 C21.2 C22.2 D2.2 D4.2 J1.4 J2.2 J3.2 J5.1 R5.1 R6.1 R7.1 R8.1 R18.1 R19.1 R20.1 R21.1 R22.1 R25.1 R26.1 R31.1 R32.1 R34.1 R37.1 R39.1 TP10.1 TP10.2 U1.23 U1.31 U1.33 U2.2 U3.2 | length 3097.1
  Top Layer w10: R37.1@65,1122.44 C19.2@120,1122.44 C9.2@120,1074.45 ; C10.2@117.56,752.44 R6.1@65,752.44 ; C10.2@120,752.44 C11.2@120,697.56 R7.1@65,697.56 ; v1(125,160) 125,339.76 129.88,344.64 129.88,490.12 30,590 30,685 42.56,697.56 R7.1@65,697.56 ; D2.2@150,1427.24 v1(150,1474.65) ; v1(150,1540) 228.73,1618.73 228.73,1801.27 200,1830 v1(200,1850) ; R39.1@280,102.56 v1(280,185) ; J1.4@300,1100 257.49,1057.49 165.01,1057.49 148.05,1074.45 C9.2@120,1074.45 ; U2.2@515.03,930.43 U2.2@512.4,927.8 U2.2@515.19,925 ; R8.1@744.45,777.56 R8.1@747.01,780.12 ; 920,760 930.79,770.79 U1.23@1025.51,770.79 1070.79,770.79 v2(1120,820) 1120,805 1170,755 1170,726.3 U1.31@1169.21,725.51 1169.21,710.18 1194.4,685 1540,685 ; C22.2@1465,247.56 C22.2@1470,242.56 C21.2@1525,242.56 ; R7.1@65,697.56 R6.1@65,752.44 ; R6.1@65,752.44 37.56,752.44 30,760 30,1060 37.56,1067.56 R5.1@65,1067.56 C9.2@120,1067.56 C9.2@120,1074.45
  Bottom Layer w10: v1(125,160) 155,160 180,185 v1(280,185) ; v1(150,1474.65) v1(150,1540)
  other v1: 2065,75 1870,180 2100,215 1500,235 2100,300 650,320 715,320 775,320 650,380 715,380 775,380 2100,400 400,490 465,490 1165,500 1210,500 2100,500 1165,545 1210,545 400,550 465,550 525,550 860,565 2100,600 400,610 465,610 525,610 2100,700 2100,800 777.17,827.69 1565,835 580,880 620,880 1565,885 1615,885 2100,900 580,920 620,920 1565,935 1615,935 1565,980 1615,980 2100,1000 1565,1030 1615,1030 1565,1080 1615,1080 2100,1100 2100,1200 2100,1300 845,1325 895,1325 945,1325 1030,1325 315,1340 365,1340 1850,1350 1950,1350 2050,1350 845,1375 895,1375 945,1375 1030,1375 315,1390 365,1390 894.46,1425 944.46,1425 1030,1425 315,1440 365,1440 1950,1450 2050,1450 2140,1500 315,1595 365,1595 2000,1600 2140,1600 315,1645 365,1645 315,1695 365,1695 2000,1700 1865,1800 2000,1800 2105,1800 350,1850 1865,1850 2000,1850 150,1900 200,1900 350,1900 1866.26,1900 2000,1900 2100,1900 200,1950 350,1950 1865,1950 150,2000 200,2000 350,2000 1865,2000 2100,2000 250,2025 300,2025 150,2100 250,2100 350,2100 450,2100 550,2150 600,2150 650,2150 700,2150 745,2150 450,2200 550,2200 600,2200 750,2200 550,2250 600,2250 750,2250
  other v2: 1120,761.93 1061.93,820 1178.07,820 1120,878.07
HALLA: C22.1 J2.4 J5.4 R30.1 R35.1 | length 1752.3
  Top Layer w10: v1(1415,145) R30.1@1415,187.44 C22.1@1470,187.44 1470,154.04 1506.04,118 1632.22,118 1640,110.22 J5.4@1640,60 ; v1(1610,280) 1640,310 1640,820 1700,880 R35.1@1767.44,880 1767.44,1007.44 1810,1050 1950,1050 J2.4@2000,1100
  Bottom Layer w10: v1(1415,145) 1415,194.64 1500.36,280 v1(1610,280)
HALLB: C21.1 J2.6 J5.3 R29.1 R36.1 | length 1659.6
  Top Layer w10: v1(1525,145) 1525,187.44 1580,187.44 1580,155 1600,135 1715,135 1740,110 J5.3@1740,60 J5.3@1736.27,63.73 ; v1(1660,280) 1660,750 1700,790 R36.1@1767.44,790 1773.11,790 1801.84,761.27 1859.38,761.27 1870.65,750 1925,750 1950,775 1950,950 J2.6@2000,1000
  Bottom Layer w10: v1(1525,145) 1620,145 1660,185 v1(1660,280)
HALLC: C20.1 J2.16 J5.2 R28.1 R38.1 | length 1306.9
  Top Layer w10: R28.1@1640,187.44 R28.1@1642.8,187.44 1695,187.44 C20.1@1700,182.44 ; v1(1700,285) 1700,281.22 1698.78,280 1682,296.78 1682,677 1705,700 R38.1@1767.44,700 1767.44,682.56 1800,650 1930,650 1950,630 1950,550 J2.16@2000,500 ; C20.1@1702.44,180 v1(1740,180) 1775,145 1830,145 1840,135 J5.2@1840,60
  Bottom Layer w10: v1(1700,285) 1700,194.1 1714.1,180 v1(1740,180)
IDRIVE: J1.18 R4.1 R8.2 R15.1 U1.19 | length 1051
  Top Layer w10: J1.18@300,400 333,367 481.48,367 638.54,524.06 638.54,591.1 R15.1@692.44,645 ; R15.1@692.44,660 692.44,735 ; R8.2@692.44,770 692.44,735 ; U1.19@1025.51,849.53 899.53,849.53 785,735 692.44,735
INHA: J2.1 U1.25 | length 1422.3
  Top Layer w10: U1.25@1051.1,725.51 1051.1,674.86 1142.96,583 1442,583 v1(1450,575)
  Bottom Layer w10: v1(1450,575) 1654.79,575 1702.69,622.9 1702.69,942.69 1854.49,1094.49 1854.49,1154.49 J2.1@1900,1200
INHB: J2.5 R36.2 U1.27 | length 1389
  Top Layer w10: U1.27@1090.47,725.51 1090.47,689.79 1163.27,617 1467.87,617 1500,584.87 v1(1500,525) ; v1(1750,835) 1810,835 1822.56,822.44 R36.2@1822.56,790
  Bottom Layer w10: v1(1500,525) 1652.88,525 1736.69,608.82 1736.69,836.69 J2.5@1900,1000
INHC: J2.9 U1.29 | length 1132.1
  Top Layer w10: U1.29@1129.84,725.51 1129.84,698.51 1177.35,651 1481.95,651 1550,582.95 v1(1550,475)
  Bottom Layer w10: v1(1550,475) 1650.96,475 1852.5,676.54 1852.5,752.5 J2.9@1900,800
INLA: J2.3 R35.2 U1.26 | length 1481
  Top Layer w10: U1.26@1070.79,725.51 1070.79,679.21 1150,600 1460.82,600 1475,585.82 v1(1475,550) ; v1(1810,1000) 1822.56,987.44 R35.2@1822.56,880
  Bottom Layer w10: v1(1475,550) 1653.83,550 1719.69,615.86 1719.69,909.69 v1(1810,1000) 1900,1090 J2.3@1900,1100
INLB: J2.7 R38.2 U1.28 | length 1295.2
  Top Layer w10: U1.28@1110.16,725.51 1110.16,694.15 1170.31,634 1474.91,634 1526,582.91 v1@1526,501.96 ; v1(1766,745) 1766.73,744.27 1805.73,744.27 1822.56,727.44 R38.2@1822.56,700
  Bottom Layer w10: v1(1525,500) 1651.92,500 1766,614.08 v1(1766,745) 1766,766 J2.7@1900,900
INLC: J2.11 U1.30 | length 1058.7
  Top Layer w10: U1.30@1149.53,725.51 1149.53,702.86 1184.39,668 1488.99,668 1575,581.99 v1(1575,450)
  Bottom Layer w10: v1(1575,450) 1583,458 1658,458 J2.11@1900,700
ISEN: C12.1 J1.16 R12.1 U2.1 | length 910.3
  Top Layer w10: J1.16@300,500 342.51,457.49 342.51,401.49 360,384 474.43,384 621.54,531.1 621.54,718.46 600,740 R12.1@527.56,740 C12.1@527.56,800 512.4,815.16 U2.1@512.4,890.39
LED: D5.1 J2.15 | length 2111
  Top Layer w10: D5.1@205,131.34 v1(205,240)
  Bottom Layer w10: v1(205,240) 361.16,240 380.68,259.52 380.68,430.68 400,450 833.92,450 953.92,330 1626.17,330 1796.17,500 J2.15@1900,500
MODE: J2.13 R14.2 R20.2 | length 1735.1
  Top Layer w10: v1(620,775) 620,780 665,825 R20.2@692.44,825
  Top Layer w20: R20.2@692.44,825 R14.2@692.44,880
  Bottom Layer w10: v1(620,775) 620,712.01 967.01,365 1613.08,365 1848.08,600 J2.13@1900,600
MOTA: J4.1 R1.2 TP4.1 U4.3 U4.4 U4.5 U4.6 U4.7 U4.8 U4.9 U4.10 U4.11 | length 2174.9
  Top Layer w10: R1.2@90,1732.56 v1(90,1770)
  Bottom Layer w10: v1(90,1770) 45,1815 45,2320 105,2380 1376.85,2380 J4.1@1526.85,2230